# EAGLE board core (EAGLE 4.13)
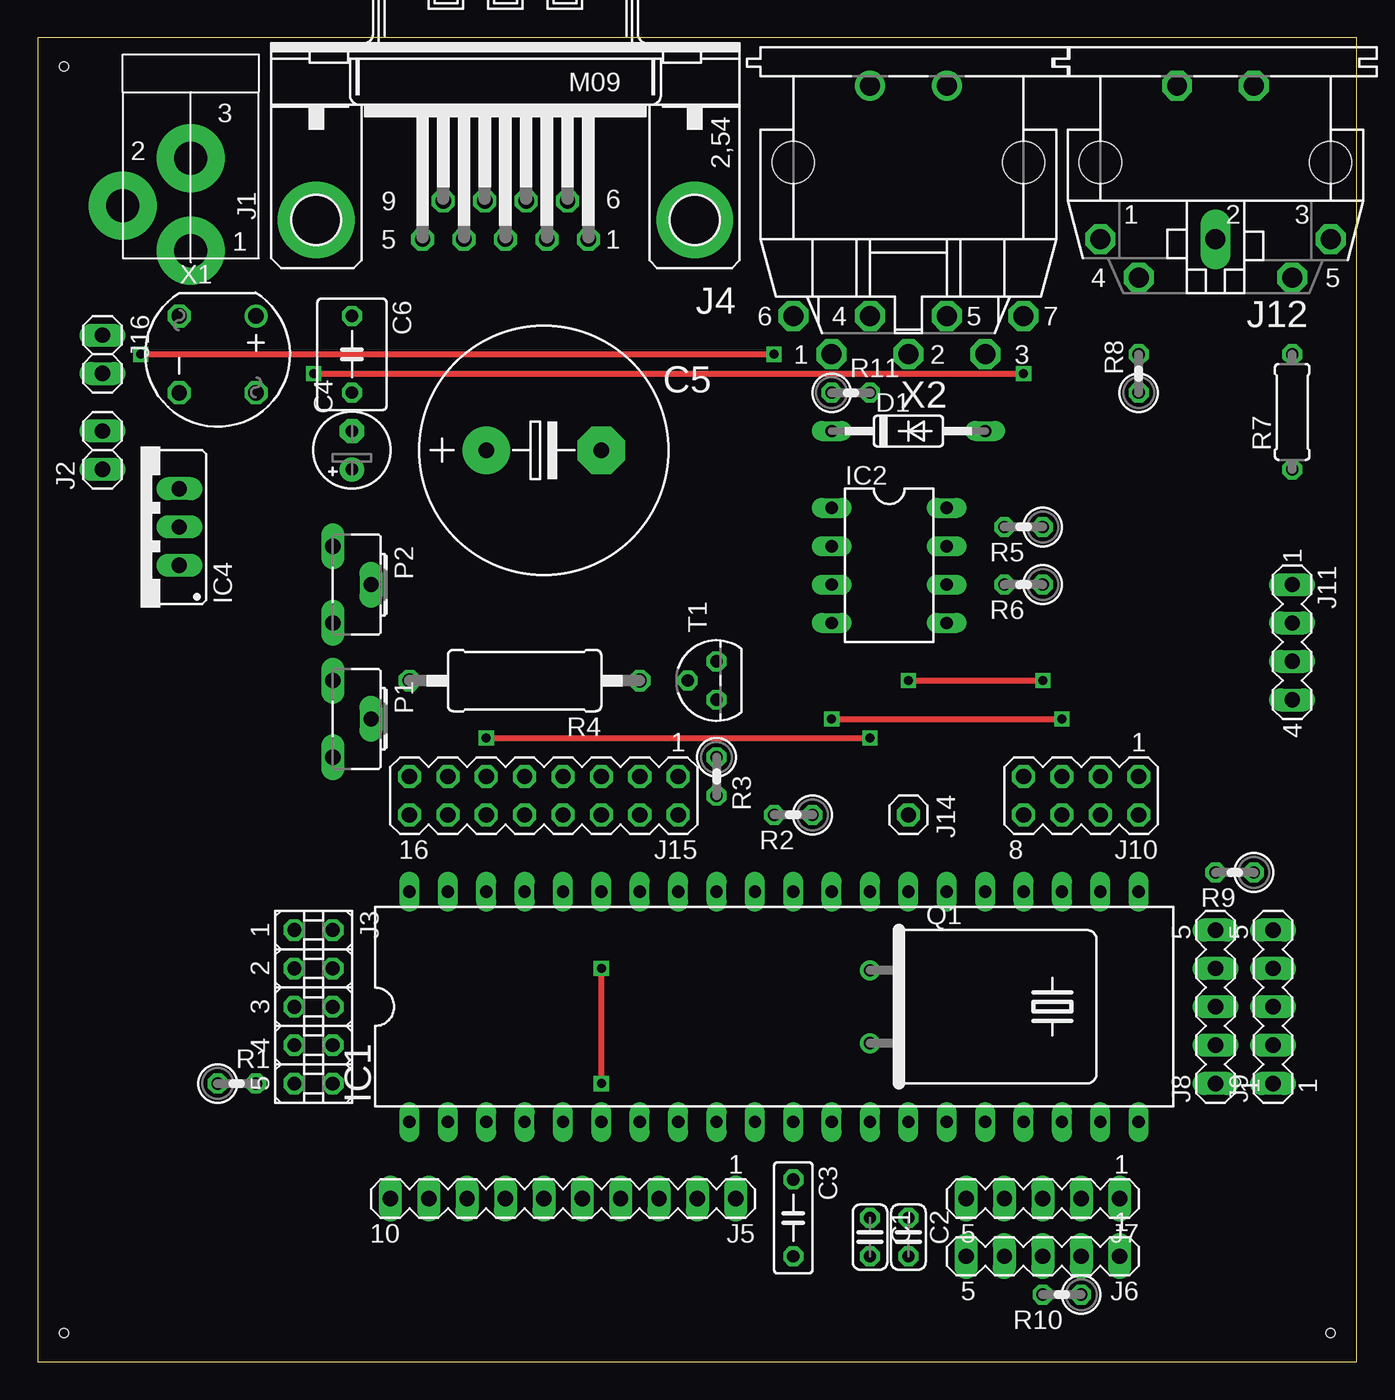
[diagram p0: board, top side]
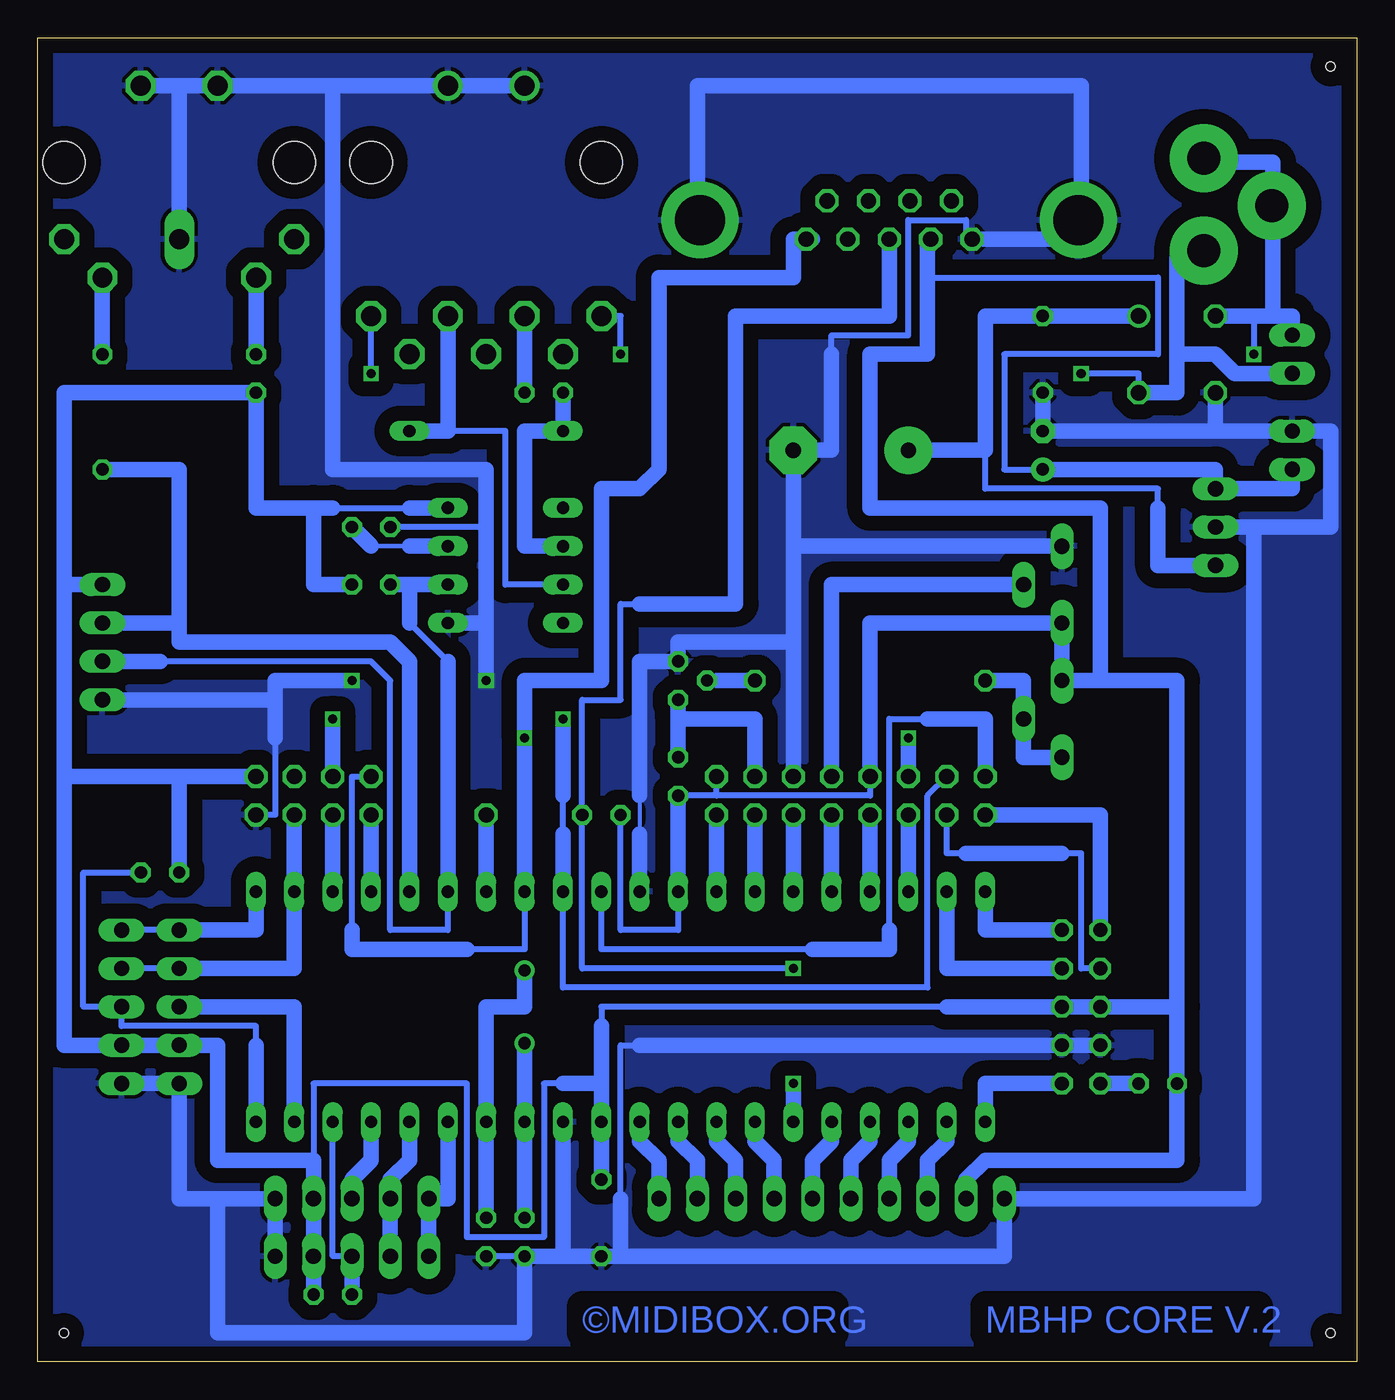
[diagram p1: board, bottom side, seen from below]

Size 87.3 x 87.62 mm. Coordinates in mm from the lower left corner, seen from the top.
Outline: 87.3,87.62 0,87.62 0,0 87.3,0 87.3,87.62
Copper layers (1*16): Top 0.035mm / dielectric 1.5mm / Bottom 0.035mm
Design rules "default": minimum track width 10mil, minimum drill 24mil, track to track 10mil, track to pad 10mil, pad to pad 10mil, via to via 10mil, smd to smd 8mil, copper to edge 40mil, drill to drill 8mil, minimum pad ring 10mil, minimum via ring 8mil, stop-mask expansion 4mil, vias tented up to drill 0mil, thermal gap 10mil
Holes 0.6 mm at 85.56,1.9 1.74,1.9 1.74,85.72

## Footprints (pad centres in the part's own frame; a part is rotated, then mirrored left to right if it is on the bottom)
C025-024X044 = drill 0.813 octagon: 1 -1.27,0; 2 1.27,0
C050-025X075 = drill 0.813 octagon: 1 -2.54,0; 2 2.54,0
E2,5-5 = drill 0.813 pad 1.6 round: + -1.27,0 | drill 0.813 pad 1.6 octagon: - 1.27,0
E7,5-16 = drill 1.016 pad 3.15 round: + -3.81,0 | drill 1.016 pad 3.15 octagon: - 3.81,0
C050-045X075 = drill 0.813 octagon: 1 -2.54,0; 2 2.54,0
DO35-10 = drill 0.813 long: A 5.08,0; C -5.08,0
DIL40 = drill 0.813 long: 1 -24.13,-7.62; 2 -21.59,-7.62; 3 -19.05,-7.62; 4 -16.51,-7.62; 5 -13.97,-7.62; 6 -11.43,-7.62; 7 -8.89,-7.62; 8 -6.35,-7.62; 9 -3.81,-7.62; 10 -1.27,-7.62; 11 1.27,-7.62; 12 3.81,-7.62; 13 6.35,-7.62; 14 8.89,-7.62; 15 11.43,-7.62; 16 13.97,-7.62; 17 16.51,-7.62; 18 19.05,-7.62; 19 21.59,-7.62; 20 24.13,-7.62; 21 24.13,7.62; 22 21.59,7.62; 23 19.05,7.62; 24 16.51,7.62; 25 13.97,7.62; 26 11.43,7.62; 27 8.89,7.62; 28 6.35,7.62; 29 3.81,7.62; 30 1.27,7.62; 31 -1.27,7.62; 32 -3.81,7.62; 33 -6.35,7.62; 34 -8.89,7.62; 35 -11.43,7.62; 36 -13.97,7.62; 37 -16.51,7.62; 38 -19.05,7.62; 39 -21.59,7.62; 40 -24.13,7.62
DIL08 = drill 0.813 long: 1 -3.81,-3.81; 2 -1.27,-3.81; 3 1.27,-3.81; 4 3.81,-3.81; 5 3.81,3.81; 6 1.27,3.81; 7 -1.27,3.81; 8 -3.81,3.81
78XXS = drill 1.016 long: GND 0,-2.54; IN -2.54,-2.54; OUT 2.54,-2.54
JACK-PMS = drill 2.184 pad 4.5 round: 1 -0.5,-3.31; 2 -5,-0.31; 3 -0.5,2.809
1X02 = drill 1.016 long: 1 -1.27,0; 2 1.27,0
JP5Q = drill 0.914 octagon: 1 -5.08,-1.27; 2 -5.08,1.27; 3 -2.54,-1.27; 4 -2.54,1.27; 5 0,-1.27; 6 0,1.27; 7 2.54,-1.27; 8 2.54,1.27; 9 5.08,-1.27; 10 5.08,1.27
M09HP = drill 1.016 octagon: 1 -5.486,1.27; 2 -2.743,1.27; 3 0,1.27; 4 2.743,1.27; 5 5.486,1.27; 6 -4.115,-1.27; 7 -1.372,-1.27; 8 1.372,-1.27; 9 4.115,-1.27 | drill 3.302 pad 5.08 round: G1 -12.522,0; G2 12.522,0
MA10-1 = drill 1.016 long: 1 -11.43,0; 2 -8.89,0; 3 -6.35,0; 4 -3.81,0; 5 -1.27,0; 6 1.27,0; 7 3.81,0; 8 6.35,0; 9 8.89,0; 10 11.43,0
MA05-1 = drill 1.016 long: 1 -5.08,0; 2 -2.54,0; 3 0,0; 4 2.54,0; 5 5.08,0
MA04-2 = drill 1.016 octagon: 1 -3.81,-1.27; 2 -3.81,1.27; 3 -1.27,-1.27; 4 -1.27,1.27; 5 1.27,-1.27; 6 1.27,1.27; 7 3.81,-1.27; 8 3.81,1.27
MA04-1 = drill 1.016 long: 1 -3.81,0; 2 -1.27,0; 3 1.27,0; 4 3.81,0
MAB5SH = drill 1.321 octagon: 1 7.62,5.08; 3 -7.62,5.08; 4 5.08,7.62; 5 -5.08,7.62; PE -2.54,-5.08; PE@ 2.54,-5.08 | drill 1.321 long: 2 0,5.08 | hole 2.794: 7.62,0; -7.62,0
1X01 = drill 1.016 octagon: 1 0,0
MA08-2 = drill 1.016 octagon: 1 -8.89,-1.27; 2 -8.89,1.27; 3 -6.35,-1.27; 4 -6.35,1.27; 5 -3.81,-1.27; 6 -3.81,1.27; 7 -1.27,-1.27; 8 -1.27,1.27; 9 1.27,-1.27; 10 1.27,1.27; 11 3.81,-1.27; 12 3.81,1.27; 13 6.35,-1.27; 14 6.35,1.27; 15 8.89,-1.27; 16 8.89,1.27
CA6H = drill 1.016 long: A -2.54,0; E 2.54,0; S 0,2.54
HC49U-H = drill 0.813 round: 1 -2.413,-5.08; 2 2.413,-5.08
0207/2V = drill 0.813 octagon: 1 -1.27,0; 2 1.27,0
0411/15 = drill 0.914 octagon: 1 -7.62,0; 2 7.62,0
0207/7 = drill 0.813 octagon: 1 -3.81,0; 2 3.81,0
TO92 = drill 0.813 octagon: 1 1.27,0; 2 0,1.905; 3 -1.27,0
RB1A = drill 1.016 round: + -2.54,2.54 | drill 1.016 octagon: - 2.54,-2.54; AC1 2.54,2.54; AC2 -2.54,-2.54
MAB7SH = drill 1.321 octagon: 1 5.08,12.7; 2 0,12.7; 3 -5.08,12.7; 4 2.54,10.16; 5 -2.54,10.16; 6 7.62,10.16; 7 -7.62,10.16 | drill 1.321 round: PE -2.54,-5.08; PE@ 2.54,-5.08 | hole 2.794: 7.62,0; -7.62,0

## Placement (x,y rotation side)
C1  33pF  [C025-024X044]  55.08,8.25 270 top
C2  33pF  [C025-024X044]  57.62,8.25 270 top
C3  100nF  [C050-025X075]  50,9.52 270 top
C4  10µF  [E2,5-5]  20.79,60.32 90 top
C5  2200µF  [E7,5-16]  33.49,60.32 0 top
C6  330nF  [C050-045X075]  20.79,66.67 270 top
D1  1N4148  [DO35-10]  57.62,61.59 0 top
IC1  PIC18F4X2DIL40  [DIL40]  48.73,23.49 0 top
IC2  6N138  [DIL08]  56.35,52.7 270 top
IC4  [78XXS]  6.82,55.24 90 top
J1  [JACK-PMS]  10.63,76.83 0 top
J2  [1X02]  4.28,60.32 90 top
J3  [JP5Q]  18.25,23.49 270 top
J4  [M09HP]  30.95,75.56 180 top
J5  [MA10-1]  34.76,10.79 180 top
J6  [MA05-1]  66.51,6.98 180 top
J7  [MA05-1]  66.51,10.79 180 top
J8  [MA05-1]  77.94,23.49 90 top
J9  [MA05-1]  81.75,23.49 90 top
J10  [MA04-2]  69.05,37.46 180 top
J11  [MA04-1]  83.02,47.62 270 top
J12  MAB5SH  [MAB5SH]  77.94,79.37 180 top
J14  [1X01]  57.62,36.19 270 top
J15  [MA08-2]  33.49,37.46 180 top
J16  [1X02]  4.28,66.67 270 top
JMP1  [JUMP]  18.25,28.57 270 top
JMP2  [JUMP]  18.25,26.03 270 top
JMP3  [JUMP]  18.25,23.49 270 top
JMP4  [JUMP]  18.25,20.95 270 top
JMP5  [JUMP]  18.25,18.41 270 top
P1  [CA6H]  19.52,42.54 270 top
P2  [CA6H]  19.52,51.43 270 top
Q1  [HC49U-H]  60.16,23.49 270 top
R1  100  [0207/2V]  13.17,18.41 0 top
R2  1K  [0207/2V]  50,36.19 180 top
R3  10K  [0207/2V]  44.92,38.73 270 top
R4  1K  [0411/15]  32.22,45.08 180 top
R5  5.6K  [0207/2V]  65.24,55.24 180 top
R6  1.2K  [0207/2V]  65.24,51.43 180 top
R7  220  [0207/7]  83.02,62.86 90 top
R8  220  [0207/2V]  72.86,65.4 90 top
R9  10K  [0207/2V]  79.21,32.38 180 top
R10  10K  [0207/2V]  67.78,4.44 180 top
R11  220  [0207/2V]  53.81,64.13 0 top
T1  BC337  [TO92]  44.92,45.08 90 top
X1  [RB1A]  11.9,66.67 270 top
X2  MAB7SH  [MAB7SH]  57.62,79.37 180 top

## Library data of the parts
C1-C6 R1-R11 = rcl
D1 = diode
IC1 = pic18f4x2
IC2 = optocoupler
IC4 = v-reg
J1 = POWER-IN
J2 J14 J16 = pinhead
J3 JMP1-JMP5 = jumper
J4 = con-subd
J5-J11 J15 = con-lstb
J12 X2 = con-hirschmann
P1 P2 = pot
Q1 = crystal
T1 = transistor-npn
X1 = rectifier

## Nets
+5V: C3.1 C4.+ IC1.11 IC1.32 IC2.8 IC4.OUT J2.1 J3.5 J3.6 J4.4 J5.9 J6.2 J7.2 J8.2 J9.2 J10.1 J11.1 J15.1 J15.9 P1.A P2.E R1.1 R2.2 R3.2 R6.1 R8.1 R9.2 R10.1
GND: C1.2 C2.2 C3.2 C4.- C5.- C6.2 IC1.12 IC1.31 IC2.5 IC4.GND J2.2 J3.7 J3.8 J4.5 J4.G1 J4.G2 J5.10 J6.1 J7.1 J8.1 J9.1 J10.2 J11.4 J12.2 J12.PE J12.PE@ J15.5 P2.A R5.2 T1.1 X1.- X2.PE X2.PE@
N$1: R11.2 X2.4
N$2: J12.4 R8.2
N$3: J12.5 R7.2
N$4: D1.A IC2.3 X2.5
N$5: D1.C IC2.2 R11.1
N$6: IC2.7 R5.1
N$7: IC1.26 IC2.6 J11.3 R6.2
N$8: IC1.25 J11.2 R7.1
N$9: IC1.1 J3.10
N$10: J1.2 J1.3 J16.1 X1.AC2 X2.6
N$11: J1.1 J16.2 X1.AC1 X2.7
N$12: C5.+ C6.1 IC4.IN X1.+
N$13: J3.9 R1.2
N$14: C1.1 IC1.13 Q1.2
N$15: C2.1 IC1.14 Q1.1
N$16: IC1.39 J3.4
N$17: IC1.40 J3.2
N$18: IC1.20 J9.3 R9.1
N$19: IC1.15 J6.5 J7.5
N$20: IC1.18 J6.3 R10.2
N$21: IC1.6 J4.3 R2.1
N$22: IC1.33 J15.2
N$23: IC1.21 J8.5 J9.5
N$24: IC1.28 J4.1 J10.7 J15.11
N$25: IC1.2 J5.8
N$26: IC1.3 J5.7
N$27: IC1.4 J5.6
N$28: IC1.5 J5.5
N$29: IC1.7 J5.4
N$30: IC1.8 J5.3
N$31: IC1.9 J5.2
N$32: IC1.10 J5.1
N$33: IC1.19 J8.3
N$34: IC1.16 J6.4 J7.4
N$35: IC1.17 J7.3
N$37: IC1.22 J8.4 J9.4 J10.4
N$38: IC1.23 J10.6
N$39: IC1.29 J10.5 J15.13
N$40: IC1.24 J10.8
N$41: IC1.27 J14.1
N$42: IC1.34 J15.4
N$43: IC1.35 J15.6
N$44: IC1.36 J15.8
N$45: IC1.37 J15.10
N$46: IC1.38 J15.12
N$47: J3.3 J15.14
N$48: J3.1 J15.16
N$49: IC1.30 J15.15
N$50: J15.3 R3.1 T1.3
N$51: R4.1 T1.2
N$52: P1.E P1.S R4.2
N$58: J15.7 P2.S

## Tracks (layer width: path | path; a pad name or v marks a point on that pad's centre or on a via)
+5V
  Bottom 0.254: 85.56,64.13 85.56,51.43 | P1.A P2.E | 28.41,74.29 J4.4
  Bottom 0.406: J7.2 J6.2 R10.1 | IC1.11 C3.1 | P1.A P2.E | 67.78,56.51 62.7,56.51 | 85.56,51.43 85.56,38.73 85.56,20.95 | 42.38,37.46 R3.2 IC1.32 44.92,28.57 48.73,28.57 R2.2 | 42.38,37.46 J15.1 | 42.38,37.46 32.22,37.46 J15.9 | 52.54,18.41 53.81,18.41 53.81,8.25 58.89,8.25 58.89,18.41 69.05,18.41 69.05,13.33 | 28.41,71.75 13.17,71.75 13.17,66.67 23.33,66.67 23.33,59.05 C4.+ | 27.14,23.49 50,23.49 50,22.22 | J8.2 J9.2 J8.2
  Bottom 1.016: C3.1 IC1.11 50,18.41 | R10.1 J7.2 69.05,13.33 75.4,13.33 75.4,20.95 J8.2 J9.2 85.56,20.95 85.56,64.13 R8.1 72.86,56.51 69.05,56.51 | J5.9 25.87,12.06 24.6,13.33 11.9,13.33 R1.1 11.9,23.49 | 11.9,23.49 J3.5 J3.6 27.14,23.49 | 50,18.41 52.54,18.41 | 77.94,38.73 R9.2 | 77.94,38.73 J10.1 | 85.56,38.73 77.94,38.73 | 16.98,45.08 P1.A P2.E 32.22,48.89 J15.9 | 16.98,45.08 11.9,45.08 11.9,23.49 | R3.2 IC1.32 | 16.98,45.08 16.98,56.51 32.22,56.51 32.22,66.67 28.41,66.67 28.41,71.75 28.41,74.29 | C4.+ 9.36,59.05 IC4.OUT 4.28,57.78 J2.1 | 62.7,56.51 IC2.8 | 69.05,56.51 67.78,56.51 | 69.05,56.51 69.05,51.43 R6.1 | 85.56,51.43 J11.1 | 50,22.22 50,18.41
GND  (via drill 0.6)
  Top 0.406: v57.62,45.08 v66.51,45.08
  Bottom 0.254: 47.46,41.27 47.46,37.46 47.46,34.92 | 25.87,74.29 J4.5 | 18.25,84.45 18.25,78.1 J4.G2 | 57.62,55.24 57.62,59.05
  Bottom 0.406: J7.1 J6.1 | C1.2 C2.2 | J8.1 J9.1 | R5.2 57.62,55.24 57.62,48.89 58.89,48.89 | 77.94,84.45 J12.PE@ 67.78,84.45 | P2.A 23.33,53.97 | 47.46,46.35 47.46,41.27 | 71.59,41.27 71.59,36.19 J10.2 | 6.82,55.24 1.74,55.24 | J4.G1 43.65,75.74 43.65,84.45 | 47.46,20.95 48.73,20.95 48.73,10.79 | 25.87,74.29 25.87,75.56 29.68,75.56 29.68,67.94 34.76,67.94 34.76,66.67 | J3.8 J3.7 J3.8
  Bottom 1.016: J9.1 J8.1 77.94,10.79 75.4,10.79 | 75.4,10.79 J7.1 J6.1 | 75.4,10.79 75.4,1.9 55.08,1.9 C1.2 52.54,6.98 | 52.54,6.98 C3.2 48.73,6.98 | 52.54,6.98 IC1.12 | 47.46,20.95 J3.8 J3.7 | 48.73,6.98 23.33,6.98 J5.10 6.82,10.79 6.82,55.24 IC4.GND 1.74,55.24 1.74,61.59 J2.2 9.36,61.59 | 48.73,6.98 48.73,10.79 | v66.51,45.08 71.59,45.08 71.59,43.81 | 71.59,43.81 J11.4 | 71.59,43.81 71.59,41.27 | 37.3,53.97 37.3,47.62 | 37.3,47.62 J15.5 | 37.3,53.97 C5.- 34.76,60.32 34.76,66.67 | P2.A 37.3,53.97 | 37.3,47.62 44.92,47.62 T1.1 47.46,46.35 47.46,37.46 | 47.46,34.92 IC1.31 | C6.2 C4.- 9.36,61.59 | 9.36,61.59 X1.- | 67.78,84.45 77.94,84.45 | 77.94,84.45 J12.PE | 18.25,75.56 18.25,84.45 43.65,84.45 43.65,75.56 | 77.94,84.45 J12.2 | 67.78,84.45 67.78,59.05 57.62,59.05 57.62,48.89 | v57.62,45.08 57.62,48.89 | 58.89,48.89 IC2.5 57.62,48.89 | X2.PE X2.PE@ 67.78,84.45 | J4.5 18.25,74.29 18.25,75.56 | 18.25,75.56 J4.G2
  pour Bottom (isolate 1.016): 86.83,0.63 86.83,86.99 0.47,86.99 0.47,0.63
N$1
  Bottom 1.016: R11.2 X2.4
N$2
  Bottom 0.406: R8.2 J12.4
  Bottom 1.016: R8.2 J12.4
N$3
  Bottom 0.406: R7.2 J12.5
  Bottom 1.016: R7.2 J12.5
N$4
  Bottom 0.406: IC2.3 56.35,51.43 56.35,61.59 60.16,61.59
  Bottom 1.016: X2.5 60.16,61.59 D1.A
N$5
  Bottom 0.406: D1.C R11.1
  Bottom 1.016: R11.1 D1.C 55.08,61.59 55.08,53.97 IC2.2
N$6
  Bottom 0.305: 62.7,53.97 65.24,53.97
  Bottom 1.016: 65.24,53.97 R5.1 | IC2.7 62.7,53.97
N$7
  Bottom 0.406: 79.21,46.35 65.24,46.35 63.97,45.08 63.97,28.57 60.16,28.57 IC1.26 | 60.16,46.35 62.7,48.89
  Bottom 1.016: IC1.26 60.16,46.35 | 62.7,51.43 IC2.6 | 62.7,51.43 R6.2 | 62.7,48.89 62.7,51.43 | 79.21,46.35 J11.3
N$8
  Bottom 0.406: 77.94,48.89 79.21,48.89
  Bottom 1.016: R7.1 77.94,59.05 77.94,48.89 | 77.94,48.89 77.94,47.62 63.97,47.62 62.7,46.35 IC1.25 | 79.21,48.89 80.48,48.89 | 80.48,48.89 J11.2 | 77.94,48.89 80.48,48.89
N$9
  Bottom 1.016: J3.10 24.6,18.41 IC1.1
N$10  (via drill 0.6)
  Top 0.406: v6.82,66.67 v48.73,66.67
  Bottom 0.254: 9.36,79.37 J1.3
  Bottom 0.406: X2.6 48.73,69.21 v48.73,66.67 | 6.82,69.21 v6.82,66.67
  Bottom 1.016: 8.09,69.21 X1.AC2 6.82,69.21 5.55,69.21 | 5.55,76.52 J1.2 | 5.55,76.52 5.55,79.37 9.36,79.37 | J16.1 4.28,69.21 5.55,69.21 | 5.55,69.21 5.55,76.52
N$11  (via drill 0.6)
  Top 0.406: v18.25,65.4 v65.24,65.4
  Bottom 0.254: 11.9,73.02 J1.1
  Bottom 0.406: X1.AC1 14.44,65.4 v18.25,65.4 | v65.24,65.4 X2.7
  Bottom 1.016: X1.AC1 11.9,64.13 11.9,66.67 | 11.9,66.67 11.9,73.02 10.63,73.02 | J16.2 8.09,65.4 9.36,66.67 11.9,66.67
N$12
  Bottom 0.406: 13.17,56.51 13.17,57.78 24.6,57.78 24.6,60.32
  Bottom 1.016: C5.+ 24.6,60.32 24.6,69.21 C6.1 X1.+ | IC4.IN 13.17,52.7 13.17,56.51
N$13
  Bottom 0.406: R1.2 J3.9
  Bottom 1.016: R1.2 J3.9
N$14
  Bottom 0.406: C1.1 IC1.13 | 55.08,20.95 Q1.2
  Bottom 1.016: C1.1 IC1.13 55.08,20.95
N$15
  Bottom 0.406: C2.1 IC1.14 | 55.08,26.03 Q1.1 55.08,23.49
  Bottom 1.016: C2.1 IC1.14 57.62,23.49 55.08,23.49 55.08,26.03
N$16
  Bottom 1.016: J3.4 27.14,26.03 IC1.39
N$17
  Bottom 1.016: J3.2 24.6,28.57 IC1.40
N$18
  Bottom 0.406: 72.86,20.95 72.86,22.22 81.75,22.22 J9.3 84.29,23.49 84.29,32.38 R9.1
  Bottom 1.016: IC1.20 72.86,20.95
N$19
  Bottom 0.406: J6.5 J7.5
  Bottom 1.016: IC1.15 60.16,10.79 J7.5 J6.5
N$20
  Bottom 0.406: IC1.18 67.78,6.98 J6.3 R10.2
  Bottom 1.016: R10.2 J6.3
N$21  (via drill 0.6)
  Top 0.406: v37.3,18.41 v37.3,26.03
  Bottom 0.406: v37.3,26.03 51.27,26.03 R2.1 51.27,43.81 48.73,43.81 48.73,50.16 47.46,50.16 | IC1.6 v37.3,18.41
  Bottom 1.016: IC1.6 v37.3,18.41 | J4.3 30.95,69.21 41.11,69.21 41.11,50.16 47.46,50.16
N$22
  Bottom 0.406: IC1.33 J15.2
  Bottom 1.016: IC1.33 J15.2
N$23
  Bottom 0.406: J8.5 J9.5
  Bottom 1.016: J8.5 72.86,28.57 IC1.21
N$24  (via drill 0.6)
  Top 0.406: v29.68,41.27 v55.08,41.27
  Bottom 0.406: v55.08,41.27 IC1.28 55.08,27.3 58.89,27.3 | 37.3,74.29 J4.1 | J10.7 66.51,38.73 66.51,28.57 | J15.11 v29.68,41.27 J15.11
  Bottom 1.016: IC1.28 v55.08,41.27 55.08,45.08 50,45.08 50,57.78 47.46,57.78 46.19,59.05 46.19,71.75 37.3,71.75 37.3,74.29 36.03,74.29 | J15.11 v29.68,41.27 | 58.89,27.3 66.51,27.3 66.51,28.57
N$25
  Bottom 1.016: J5.8 28.41,13.33 27.14,14.6 IC1.2
N$26
  Bottom 1.016: J5.7 30.95,13.33 29.68,14.6 IC1.3
N$27
  Bottom 1.016: J5.6 33.49,13.33 32.22,14.6 IC1.4
N$28
  Bottom 1.016: J5.5 36.03,13.33 34.76,14.6 IC1.5
N$29
  Bottom 1.016: J5.4 38.57,13.33 39.84,14.6 IC1.7
N$30
  Bottom 1.016: J5.3 41.11,13.33 42.38,14.6 IC1.8
N$31
  Bottom 1.016: J5.2 43.65,13.33 44.92,14.6 IC1.9
N$32
  Bottom 1.016: J5.1 46.19,13.33 47.46,14.6 IC1.10
N$33
  Bottom 1.016: IC1.19 70.32,23.49 J8.3
N$34
  Bottom 0.406: J6.4 J7.4
  Bottom 1.016: J6.4 J7.4 63.97,12.06 62.7,13.33 IC1.16
N$35
  Bottom 1.016: IC1.17 65.24,13.33 66.51,12.06 J7.3
N$37
  Bottom 0.406: J8.4 J9.4 | IC1.22 J10.4
  Bottom 1.016: J8.4 70.32,26.03 IC1.22 J10.4
N$38
  Bottom 0.406: IC1.23 J10.6
  Bottom 1.016: IC1.23 J10.6
N$39  (via drill 0.6)
  Top 0.406: v52.54,42.54 v67.78,42.54
  Bottom 0.406: 52.54,34.92 52.54,37.46 | v67.78,42.54 J10.5 | IC1.29 52.54,24.76 28.41,24.76 28.41,37.46 J15.13
  Bottom 1.016: v67.78,42.54 J10.5 | IC1.29 52.54,34.92 | 52.54,37.46 v52.54,42.54
N$40
  Bottom 0.406: IC1.24 J10.8
  Bottom 1.016: IC1.24 J10.8
N$41
  Bottom 0.406: IC1.27 J14.1
  Bottom 1.016: IC1.27 J14.1
N$42
  Bottom 0.406: IC1.34 J15.4
  Bottom 1.016: IC1.34 J15.4
N$43
  Bottom 0.406: IC1.35 J15.6
  Bottom 1.016: IC1.35 J15.6
N$44
  Bottom 0.406: IC1.36 J15.8
  Bottom 1.016: IC1.36 J15.8
N$45
  Bottom 0.406: IC1.37 J15.10
  Bottom 1.016: IC1.37 J15.10
N$46
  Bottom 0.406: IC1.38 J15.12
  Bottom 1.016: IC1.38 J15.12
N$47
  Bottom 0.406: J3.3 18.25,26.03 18.25,33.65 19.52,33.65 | 25.87,33.65 27.14,33.65 J15.14
  Bottom 1.016: 19.52,33.65 25.87,33.65
N$48
  Bottom 1.016: J15.16 16.98,36.19 J3.1
N$49
  Bottom 0.406: IC1.30 50,27.3 36.03,27.3 | 30.95,28.57 30.95,42.54 28.41,42.54
  Bottom 1.016: J15.15 24.6,42.54 28.41,42.54 | 36.03,27.3 30.95,27.3 30.95,28.57
N$50
  Bottom 1.016: 44.92,42.54 R3.1 | 44.92,42.54 T1.3 | J15.3 39.84,42.54 44.92,42.54
N$51
  Bottom 0.254: 42.38,45.08 T1.2
  Bottom 1.016: R4.1 42.38,45.08
N$52
  Bottom 1.016: P1.E 22.06,40 P1.S 22.06,45.08 R4.2
N$58
  Bottom 1.016: P2.S 34.76,51.43 J15.7

## Text on the board
Bottom: MBHP CORE V.2 | ©MIDIBOX.ORG